# Altium PCB 理想整流桥.PcbDoc
Units mil, origin at the board's own origin, x right, y up, seen from the top; angles counter-clockwise.
Board outline 2755.91 x 1574.8 mil, 2 copper layers (Top Layer, Bottom Layer); 8 components, 8 nets, 35 pads, 54 vias.
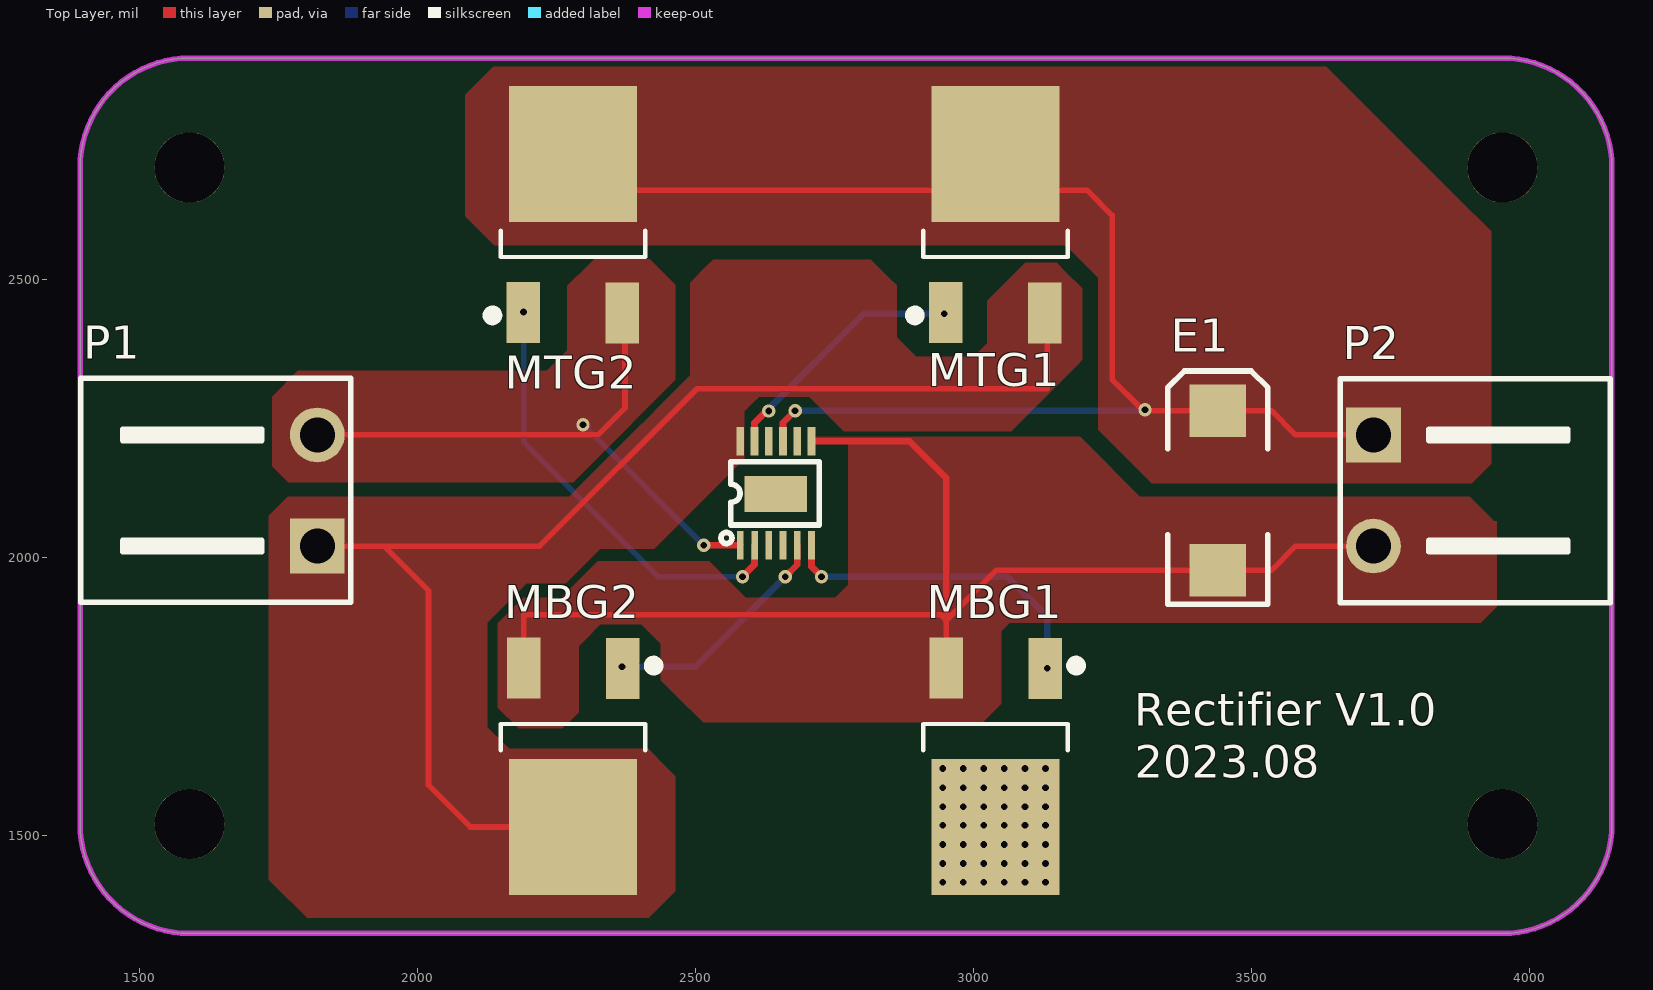
[diagram p0: Top Layer view]
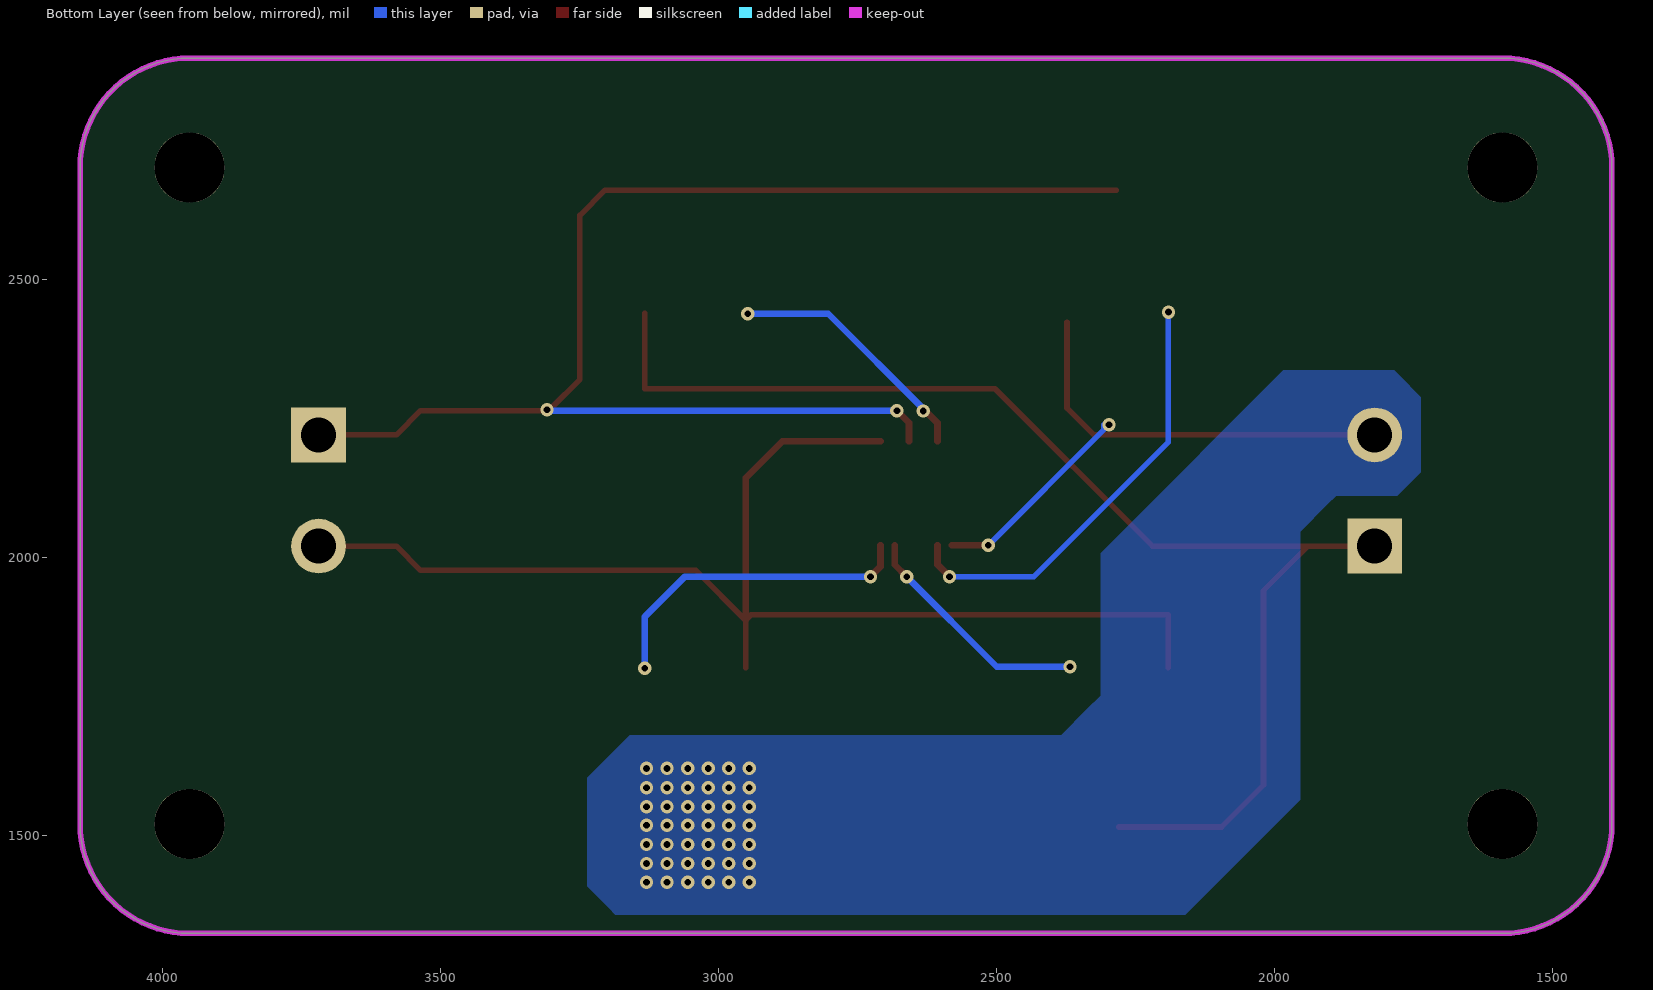
[diagram p1: Bottom Layer view, seen from below]

## Layer stack, top to bottom
Top Layer: signal copper 1.4
Dielectric: dielectric 12.6, FR-4, Dk 4.8
Bottom Layer: signal copper 1.4

## Board outline
1393.15,1520 1393.15,2701.1 cw(c1590,2701.1) 1590,2897.95 3952.2,2897.95 cw(c3952.2,2701.1) 4149.06,2701.1 4149.06,1520 cw(c3952.2,1520) 3952.2,1323.15 1590,1323.15 cw(c1590,1520)

## Design rules (kind name [scope] priority, off if disabled: settings)
Clearance [All] p1: gap=10
PolygonConnect [All] p1: connectstyle=Direct reliefconductorwidth=10 reliefentries=4 polygonreliefangle="90 Angle"
RoutingVias [All] p1: holewidth=28 width=50 viastyle="Through Hole" minholewidth=28 minwidth=50 maxholewidth=28 maxwidth=50
SilkscreenOverComponentPads [All] p1: minsilkscreentomaskgap=10
SolderMaskExpansion [All] p1: expansion=4
Width [All] p1: maxlimit=50 minlimit=10 preferedwidth=10
27 further rules are at their usual default settings.

## Classes and differential pairs
component class 理想整流桥: E1 MBG1 MBG2 MTG1 MTG2 P1 P2

## Components (designator, comment, footprint, x,y, rotation, side; value= is the part's Value field where it differs from the comment)
E1 "10uF/50V" "CD D(7343)" 3440,2120 r270 top
MBG1 "NCE7560K" TO252 3040,1680 r180 top
MBG2 "NCE7560K" TO252 2280,1680 r180 top
MTG1 "NCE7560K" TO252 3040,2560 r0 top
MTG2 "NCE7560K" TO252 2280,2560 r0 top
P1 "Header 2" KF2EDGK5.08-WI-2P 1820,2120 r90 top
P2 "Header 2" KF2EDGK5.08-WI-2P 3720,2120 r270 top
U?? "LT4320IMSE#PBF" MSOP-12_L4.0-W3.0-P0.65-LS4.9-BL-EP 2645,2115 r0 top

## Footprints (in the part's own frame and the unit in brackets; to place one, negate y for a bottom-side part, rotate by r counter-clockwise, add the part's x,y. Pads: shape width x height; smd on the part's side, far side on the other; paste and mask are expansions set on the pad)
"CD D(7343)" [mm] "长7.3mm，宽4.3mm，厚2.8mm      淘宝ID:黄晶宝石"
  rect 2.4x2.6 smd: 1(-3.65,0) 2(3.65,0)
  silkscreen extent -5.46,-2.29 5.21,2.29, body extent -3.65,-2.15 3.65,2.15, height 2.8
KF2EDGK5.08-WI-2P [mm] "卧插端子"
  rect 2.5x2.5 hole 1.6: 1(-2.54,0)
  round 2.5 hole 1.6: 2(2.54,0)
  silkscreen extent -5.11,-1.52 5.13,10.82, body extent -5.08,-0.5 5.08,10.8, height 8.5
MSOP-12_L4.0-W3.0-P0.65-LS4.9-BL-EP [mm]
  rect 0.3x1.3 smd: 1(-1.625,-2.375) 2(-0.975,-2.375) 3(-0.325,-2.375) 4(0.325,-2.375) 5(0.975,-2.375) 6(1.625,-2.375)
  rect 0.35x1.3 smd: 7(1.625,2.375) 8(0.975,2.375) 9(0.325,2.375) 10(-0.325,2.375) 11(-0.975,2.375) 12(-1.625,2.375)
  rect 2.85x1.65 smd: 13(0,-0.038)
  silkscreen extent -2.51,-2.3 1.98,1.45
TO252 [mil] "252晶体管"
  rect 60x110 smd: 1(-89.55,-119.77) 3(88.45,-120.77)
  rect 230x245 smd: 2(0,165.35)
  silkscreen extent -153,-133 130,28, body extent -128,-120 128,251, height 91

## Part data
E1: library part CT, "贴片钽电容"
MBG1 MBG2 MTG1 MTG2: library part IRF3710, "N沟场效应管"
P1 P2: "Header, 2-Pin"

## Free pads (board coordinates)
  round 125.98 hole 125.98: ""(1590,2701.1) ""(1590,1520) ""(3952.2,1520) ""(3952.2,2701.1)

## Via types
v1: diameter 24, hole 12, Top Layer to Bottom Layer, 54 vias

## Nets (pads, with @x,y where several pads share a name; then routed paths per layer and width w, separated by ;. In a path a pad name is that pad's centre, name@x,y a point inside that pad or via, vN(x,y) a via of type N, cw(c..) or ccw(c..) an arc to the next point about the centre after c; other vN are vias at no path point)
IN1: MBG2.2 MTG1.3 P1.1 U??.12 | length 2321
  Top Layer w10: P1.1 1940,2020 ; MBG2.2 2095.35,1514.65 2020,1590 2020,1940 1940,2020 ; MTG1.3@3133.45,2439.23 3133.45,2303.45 2503.45,2303.45 2220,2020 1940,2020
IN2: MBG1.2 MTG2.3 P1.2 U??.1 | length 1105.7
  Top Layer w10: P1.2 2325,2220 2373.45,2268.45 MTG2.3@2373.45,2423
  Top Layer w12: v1(2515,2021.5) U??.1
  Bottom Layer w10: v1(2298,2238) 2307,2238 2307,2229.5 v1(2515,2021.5)
  other v1: 2945,1415 2982,1415 3019,1415 3056,1415 3093,1415 3130,1415 2945,1449 2982,1449 3019,1449 3056,1449 3093,1449 3130,1449 2945,1483 2982,1483 3019,1483 3056,1483 3093,1483 3130,1483 2945,1518 2982,1518 3019,1518 3056,1518 3093,1518 3130,1518 2945,1551 2982,1551 3019,1551 3056,1551 3093,1551 3130,1551 2945,1585 2982,1585 3019,1585 3056,1585 3093,1585 3130,1585 2945,1620 2982,1620 3019,1620 3056,1620 3093,1620 3130,1620
NetMBG1_1: MBG1.1 U??.6 | length 592.8
  Top Layer w12: U??.6 2708.98,1983.02 v1(2727,1965)
  Bottom Layer w12: v1(2727,1965) 3061,1965 3133,1893 v1(3133,1800)
NetMBG2_1: MBG2.1 U??.5 | length 426.5
  Top Layer w12: v1(2662,1965) 2683.39,1986.39 U??.5
  Bottom Layer w12: v1(2368,1803) 2500,1803 v1(2662,1965)
NetMTG1_1: MTG1.1 U??.11 | length 463.8
  Top Layer w12: U??.11 2606.61,2241.61 2628,2263 v1(2632,2263)
  Bottom Layer w12: v1(2632,2263) 2628,2263 2803,2438 v1(2948,2438)
NetMTG2_1: MTG2.1 U??.2 | length 793.7
  Top Layer w12: v1(2585,1965) 2606.61,1986.61 U??.2
  Bottom Layer w10: v1(2191,2441) 2191,2207 2433,1965 v1(2585,1965)
OUTN: E1.2 MBG1.3 MBG2.3 P2.2 U??.7 | length 2295.3
  Top Layer w10: MBG2.3 2191.55,1896.55 2941.55,1896.55 2951.55,1886.55 ; MBG1.3 2951.55,1886.55 ; P2.2 3580,2020 3536.3,1976.3 E1.2 3041.3,1976.3 2951.55,1886.55
  Top Layer w12: U??.7 2885.5,2208.5 2951.55,2142.45 2951.55,1886.55
OUTP: E1.1 MTG1.2 MTG2.2 P2.1 U??.9 | length 2475.1
  Top Layer w10: MTG2.2@2285,2660.35 3204.65,2660.35 3250,2615 3250,2320 v1@3302,2268 ; v1@3306.3,2263.7 E1.1 3536.3,2263.7 3580,2220 P2.1
  Top Layer w12: U??.9 2657.8,2241.8 v1(2679.5,2263.5)
  Bottom Layer w12: v1(2679.5,2263.5) v1@3306.5,2263.5
  other v1: 3309,2265
pads on no net: U??.3 U??.4 U??.8 U??.10 U??.13

## Polygon pours and split planes (outlines as drawn)
IN2 on Bottom Layer "Bottom Layer-No Net" (solid, remove dead copper, pour order 1000): 1737,2169 1737,2282 1737,2288 1776,2327 1785,2336 1931,2336 1984,2336 2283,2037 2313,2007 2313,1793 2313,1751 2337,1727 2384,1680 2529,1680 3160,1680 3214,1626 3237,1603 3237,1541 3237,1408 3198,1369 3186,1357 3056,1357 2161,1357 2054,1464 1954,1564 1954,2002 1954,2046 1905,2095 1889,2111 1833,2111 1779,2111 1737,2153 1737,2169
IN1 on Top Layer "Bottom Layer-No Net" (solid, pour order 1016): 2302,2009 2308,2015 2393,2015 2400,2015 2527,2142 2551,2166 2551,2289 2540,2289 2297,2046
OUTN on Top Layer "Bottom Layer-No Net" (solid, remove dead copper, pour order 1015): 2775,1936 2775,2206.5 2777,2208.5 2778.5,2210 2943,2210 2943,1991 2900,1948
OUTN on Top Layer "Bottom Layer-No Net" (solid, remove dead copper, pour order 1014): 2927,2086 2927,2153.5 2872,2208.5 2876.5,2213 2966,2213 2986,2213 3034,2165 3047,2152 3047,2081
OUTN on Top Layer "Bottom Layer-No Net" (solid, remove dead copper, pour order 1013): 3309,2095 3309,2100 3193,2216 3192,2217 2765,2217 2708,2217 2716.5,2208.5 2878,2208.5 2885.5,2208.5 2951.55,2142.45 2951.55,2105
OUTN on Top Layer "Bottom Layer-No Net" (solid, remove dead copper, pour order 1012): 3096,1913 3016,1833 2998,1833 2998,1929 2991,1936
OUTN on Top Layer "Bottom Layer-No Net" (solid, remove dead copper, pour order 1011): 3893,2109 3226,2109 2934,2109 2732,1907 2757,1882 3887,1882 3913,1882 3940,1909 3942,1911 3942,2065 3937,2065 3893,2109
OUTP on Top Layer "Bottom Layer-No Net" (solid, remove dead copper, pour order 1010): 2086,2613 2086,2832 2124,2870 2138,2884 3109,2884 3634,2884 3873,2645 3932,2586 3932,2360 3932,2168 3911,2147 3897,2133 3602,2133 3321,2133 3279,2175 3225,2229 3225,2449 3225,2503 3174,2554 3167,2561 2250,2561 2138,2561 2086,2613
IN1 on Top Layer "Bottom Layer-No Net" (solid, remove dead copper, pour order 1009): 2198,1980 2198,1954 2081,1837 2021,1897 2021,1950
OUTN on Top Layer "Bottom Layer-No Net" (solid, remove dead copper, pour order 1008): 2228,1896.55 2324.45,1993 2501,1993 2525,1993 2607,1911 2592.55,1896.55 2273,1896.55
OUTN on Top Layer "Bottom Layer-No Net" (solid, remove dead copper, pour order 1007): 2145,1729 2145,1881 2188,1924 2191,1927 2287,1927 3005,1927 3036,1896 3050,1882 3050,1779 3050,1736 3026,1712 3017,1703 2911,1703 2514,1703 2467,1750 2438,1779 2438,1836 2438,1844 2409,1873 2403,1879 2337,1879 2329,1879 2300,1850 2290,1840 2290,1777 2290,1721 2273,1704 2261,1692 2190,1692 2182,1692 2145,1729
IN1 on Top Layer "Bottom Layer-No Net" (solid, remove dead copper, pour order 1006): 3196,2355 3068,2227 2934,2227 2767.45,2227 2691,2303.45 2740.55,2353 3089,2353
IN1 on Top Layer "Bottom Layer-No Net" (solid, remove dead copper, pour order 1005): 2273,2109 2581,2417 2701,2417 2841,2417 2912,2346 2932,2326 3133.45,2326 3133.45,2303.45 3130,2300 3130,2289 2551,2289 2279,2017
IN1 on Top Layer "Bottom Layer-No Net" (solid, remove dead copper, pour order 1004): 1767,2109 2289,2109 2523,2343 2533,2353 2557,2353 2593,2353 2623,2323 2629,2317 2629,2303.45 2617.45,2303.45 2276,1962 2267,1953 2126,1953 1771,1953 1752,1972
IN1 on Top Layer "Bottom Layer-No Net" (solid, remove dead copper, pour order 1003): 2126,1953 2241,1953 2554,2266 2577,2289 2785,2289 3130,2289 3188,2347 3196,2355 3196,2450 3196,2484 3166,2514 3150,2530 3098,2530 3094,2530 3047,2483 3025,2461 3025,2388 3025,2385 3006,2366 3001,2361 2759,2361 2525,2361 2286,2122 2273,2109 1970,2109
IN1 on Top Layer "Bottom Layer-No Net" (solid, remove dead copper, pour order 1002): 1767,2109 1877,2109 1970,2109 2079,2000 2126,1953 2126,1706 2126,1694 2156,1664 2165,1655 2406,1655 2415,1655 2446,1624 2464,1606 2464,1439 2464,1399 2420,1355 2416,1351 2269,1351 1802,1351 1742,1411 1733,1420 1733,1972 1733,2075 1767,2109
IN2 on Top Layer "Bottom Layer-No Net" (solid, remove dead copper, pour order 1001): 1785,2335 2233,2335 2257,2359 2270,2372 2270,2476 2270,2488 2308,2526 2318,2536 2402,2536 2418,2536 2452,2502 2464,2490 2464,2358 2464,2319 2309,2164 2280,2135 1843,2135 1768,2135 1740,2163 1739,2164 1739,2235 1739,2289 1785,2335
IN1 on Top Layer "Bottom Layer-No Net" (solid, pour order 1000): 2527,2142 2568,2183 2588,2183 2588,2262.45 2629,2303.45 2614.45,2318 2567,2318 2567,2307 2527,2267 2527,2142
IN1 on Top Layer "Bottom Layer-No Net" (solid, pour order 1001): 2588,2183 2588,2177 2429,2018 2426,2015 2400,2015 2368,2015 2353,2030 2351,2032 2351,2081 2351,2151 2434.98,2234.98
IN1 on Top Layer "Bottom Layer-No Net" (solid, pour order 1002): 2497,2317 2491,2323 2491,2418 2491,2494 2521,2524 2532,2535 2622,2535 2723,2535 2841,2417 2868,2390 2868,2324
IN1 on Top Layer "Bottom Layer-No Net" (solid, pour order 1003): 2532,2535 2816,2535 2846,2505 2862,2489 2862,2354
IN1 on Bottom Solder "Bottom Layer-No Net" (solid): 2916,1649 3164,1649 3165,1648 3165,1391 2922,1391 2916,1397 2916,1649
IN1 on Top Solder "Bottom Layer-No Net" (solid): 2259,1919 2259,1922 2295,1958 2327,1990 2446,1990 2468,1990 2536,1922

## Keep-outs
Keep-Out Layer:
  the board outline again, w10

## Silkscreen, mask and mechanical layers (free items; w line width, h text height)
Top Overlay:
  text "Rectifier V1.0" at 3290,1677 h100
  text "2023.08" at 3291,1583 h100
Top Solder:
  lines w75: 2191,1758 2191,1847 2232,1888 2281,1888 2333,1940 2447,1940 ; 2951,1752 2951,1971
  lines w100: 1820,2020 2258,2020 2583,2345 2790,2345 2838,2297 3033,2297 3129,2393 3129,2461 ; 1820,2220 2257,2220 2369,2332 2369,2476 ; 1975,2020 1975,1596 2047,1524 2277,1524 ; 2282,2733 3219,2733 3283,2669 3283,2299 3319,2263 3567,2263 3610,2220 3720,2220 ; 2447,1940 2553,1834 2738,1834 2880,1976 3561,1976 3605,2020 3720,2020
Bottom Solder:
  lines w100: 1820,2220 1915,2220 2102,2033 2102,1801 2397,1506 2997,1506